# EAGLE board 4*Vibrationdriver_MSP430 (EAGLE 7.2.0)
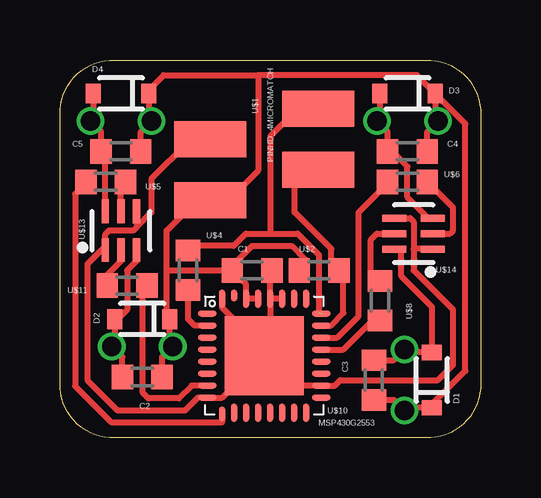
[diagram p0: board, top side]

Size 17.53 x 15.75 mm. Coordinates in mm from the lower left corner, seen from the top.
Outline: 17.53,13.46 17.53,2.29 arc-93 15.24,0 2.29,0 arc-93 0,2.29 0,13.46 arc-93 2.29,15.75 15.24,15.75 arc-93 17.53,13.46
Copper layers (1*16): Top 0.035mm / dielectric 1.5mm / Bottom 0.035mm
Design rules "we-dru": minimum track width 0.15mm, minimum drill 0.3mm, track to track 0.15mm, track to pad 0.15mm, pad to pad 0.15mm, via to via 0.15mm, smd to smd 0.1mm, copper to edge 0.5mm, drill to drill 0.2mm, minimum pad ring 0.18mm, minimum via ring 0.2mm, stop-mask expansion 0.1mm, vias tented up to drill 0.5mm, thermal gap 0.25mm

## Footprints (pad centres in the part's own frame; a part is rotated, then mirrored left to right if it is on the bottom)
603 = smd 0.889 x 1.016: 1 -0.826,0; 2 0.826,0
SOD-323 = smd 0.63 x 0.83: A 1.15,0; C -1.15,0
MICROMATCH4P0L = smd 1.5 x 3: P$1 -1.905,2.25; P$2 -0.635,-2.25; P$3 0.635,2.25; P$4 1.905,-2.25
PINHD2 = drill 0.8: P$1 -1.27,0; P$2 1.27,0
QFN32 = smd 0.762 x 0.254: 1 -2.375,1.75; 2 -2.375,1.25; 3 -2.375,0.75; 4 -2.375,0.25; 5 -2.375,-0.25; 6 -2.375,-0.75; 7 -2.375,-1.25; 8 -2.375,-1.75; 17 2.375,-1.75; 18 2.375,-1.25; 19 2.375,-0.75; 20 2.375,-0.25; 21 2.375,0.25; 22 2.375,0.75; 23 2.375,1.25; 24 2.375,1.75 | smd 0.254 x 0.635: 9 -1.75,-2.438 | smd 0.254 x 0.762: 10 -1.25,-2.375; 11 -0.75,-2.375; 12 -0.25,-2.375; 13 0.25,-2.375; 14 0.75,-2.375; 15 1.25,-2.375; 16 1.75,-2.375; 25 1.75,2.375; 26 1.25,2.375; 27 0.75,2.375; 28 0.25,2.375; 29 -0.25,2.375; 30 -0.75,2.375; 32 -1.75,2.375 | smd 0.254 x 0.508: 31 -1.25,2.5 | smd 3.302 x 3.302: TP 0,0
SOT363 = smd 0.3 x 0.99: 1 -0.65,-0.8; 2 0,-0.8; 3 0.65,-0.8; 4 0.65,0.81; 5 0,0.81; 6 -0.65,0.81

## Placement (x,y rotation side)
C1  10µ  [603]  8,6.99 0 top
C2  100n  [603]  3.43,2.54 180 top
C3  100n  [603]  13.08,2.41 90 top
C4  100n  [603]  14.48,11.94 180 top
C5  100n  [603]  2.54,11.94 180 top
D1  250mA/100V  [SOD-323]  15.49,2.41 90 top
D2  250mA/100V  [SOD-323]  3.43,4.95 180 top
D3  250mA/100V  [SOD-323]  14.48,14.35 180 top
D4  250mA/100V  [SOD-323]  2.54,14.35 180 top
U$1  PINHD_4MICROMATCH  [MICROMATCH4P0L]  8.51,11.81 270 top
U$1.6  PINHD_22.54MM  [PINHD2]  14.48,13.21 180 top
U$1.7  PINHD_22.54MM  [PINHD2]  14.35,2.41 90 top
U$2  10k  [603]  10.8,6.99 180 top
U$2.0  PINHD_22.54MM  [PINHD2]  3.43,3.81 180 top
U$3.0  PINHD_22.54MM  [PINHD2]  2.54,13.21 180 top
U$4  100  [603]  5.33,6.99 90 top
U$5  10k  [603]  1.91,10.67 180 top
U$6  10k  [603]  14.48,10.67 180 top
U$8  10k  [603]  13.34,5.71 270 top
U$10  MSP430G2553  [QFN32]  8.51,3.43 0 top
U$11  10k  [603]  2.79,6.35 0 top
U$13  MMDT3904  [SOT363]  2.54,8.64 0 top
U$14  MMDT3904  [SOT363]  14.73,8.51 90 top

## Library data of the parts
C1-C5 U$1 U$1.6 U$1.7 U$2 U$2.0 U$3.0 U$4-U$6 U$8 U$10 U$11 = thar
D1-D4 = SparkFun-DiscreteSemi; PROD_ID: DIO-09646
U$13 U$14 = SparkFun-DiscreteSemi; PROD_ID: TRANS-09373

## Nets
GND: C1.2 U$1.P$2 U$10.8 U$10.18 U$10.27 U$10.28 U$10.32 U$10.TP U$13.1 U$13.4 U$14.1 U$14.4
N$2: C2.2 D2.A U$2.0.P$2 U$13.3
N$3: U$6.1 U$14.2
N$4: C3.2 D1.A U$1.7.P$2 U$14.6
N$5: U$5.1 U$13.5
N$6: U$11.1 U$13.2
N$11: U$4.1 U$10.2
N$13: U$6.2 U$10.22
N$14: U$8.1 U$14.5
N$16: C4.2 D3.A U$1.6.P$2 U$14.3
N$18: U$8.2 U$10.21
N$19: U$5.2 U$10.9
N$20: C5.2 D4.A U$3.0.P$2 U$13.6
N$22: U$10.7 U$11.2
RST: U$1.P$3 U$2.1 U$10.23
TST: U$1.P$1 U$4.2 U$10.24
VCC: C1.1 C2.1 C3.1 C4.1 C5.1 D1.C D2.C D3.C D4.C U$1.6.P$1 U$1.7.P$1 U$1.P$4 U$2.0.P$1 U$2.2 U$3.0.P$1 U$10.29 U$10.30

## Tracks (layer width: path | path; a pad name or v marks a point on that pad's centre or on a via)
GND
  Top 0.254: U$10.27 U$10.28 | U$10.32 6.76,5.43 8.25,3.94 8.25,3.68 U$10.TP | U$10.28 8.76,3.68 U$10.TP | 7.87,2.79 6.76,1.68 U$10.8 5.74,1.68 5.21,1.14 2.41,1.14 1.14,2.41 1.14,7.24 1.89,7.99 | 7.87,2.79 U$10.TP | U$10.28 8.76,6.92 C1.2 | U$1.P$2 5.97,12.45 | 5.33,12.32 5.04,12.32 | 9.78,2.16 8.51,2.16 7.87,2.79 | 7.24,12.32 6.1,12.32 | 5.84,12.45 5.97,12.45 | 5.97,12.45 6.1,12.32 | U$10.TP 9.76,2.18 U$10.18 11.45,2.18 11.68,2.41 15.75,2.41 16.38,3.05 16.38,5.33 14.73,6.99 14.73,7.87 | U$14.4 14.59,9.16 14.73,9.02 14.73,7.87 | U$14.1 15.53,7.87 14.73,7.87 | 3.19,9.54 U$13.4 3.19,8.78 | 3.19,8.78 3.05,8.64 2.03,8.64 1.89,8.49 1.89,7.99 | U$13.1 1.89,7.99 | 6.1,12.32 5.33,12.32 | 5.33,12.32 3.81,10.8 3.81,9.4 3.19,8.78
N$2
  Top 0.254: C2.2 2.6,3.37 U$2.0.P$2 2.28,3.93 D2.A 2.41,4.95 2.79,5.33 2.79,6.99 3.19,7.38 U$13.3
N$3
  Top 0.254: U$14.2 16.26,8.51 16.38,8.64 16.38,9.59 U$6.1
N$4
  Top 0.254: C3.2 13.91,3.24 U$1.7.P$2 14.47,3.56 D1.A 15.49,5.46 14.22,6.73 14.22,7.86 U$14.6
N$5
  Top 0.254: U$13.5 2.54,10.48 U$5.1
N$6
  Top 0.254: 2.03,6.41 U$11.1 1.97,6.8 2.54,7.37 U$13.2
N$11
  Top 0.254: 5.33,6.22 5.4,6.16 U$4.1 5.33,4.95 5.61,4.68 U$10.2
N$13
  Top 0.254: U$10.22 11.55,4.18 12.45,5.08 12.45,9.4 13.72,10.67 | 13.72,10.67 13.84,10.8 | U$6.2 13.72,10.67
N$14
  Top 0.254: U$14.5 13.21,8.51 12.95,8.25 12.95,6.92 U$8.1
N$16
  Top 0.254: D3.A 13.33,13.33 U$1.6.P$2 13.65,12.76 C4.2 13.84,11.94 14.48,11.3 14.48,10.03 15.35,9.16 U$14.3
N$18
  Top 0.254: U$10.21 11.81,3.68 13.02,4.89 U$8.2
N$19
  Top 0.254: U$10.9 6.76,0.66 6.73,0.64 2.16,0.64 0.63,2.16 0.63,10.16 0.76,10.29 0.76,10.54 0.89,10.67 U$5.2
N$20
  Top 0.254: D4.A 1.39,13.33 U$3.0.P$2 1.71,12.76 C5.2 1.52,11.94 1.89,11.57 U$13.6
N$22
  Top 0.254: U$10.7 5.48,2.18 4.95,1.65 3.68,1.65 3.43,1.91 3.43,5.97 3.62,6.16 U$11.2
RST
  Top 0.254: U$10.23 11.28,4.68 11.81,5.21 11.81,6.8 U$2.1 | U$2.1 11.81,6.99 | 11.56,11.05 11.3,11.3 10.89,11.3 U$1.P$3 10.63,11.05 9.78,11.05 9.78,9.4 11.3,7.87 11.3,7.24 11.56,6.99 U$2.1
TST  (1 unrouted)
  Top 0.254: U$10.24 11.02,5.18 | 10.8,5.21 10.8,7.62 9.91,8.51 8.76,8.51 | 10.16,13.72 U$1.P$1 10.63,13.59 9.78,13.59 8.76,12.57 8.76,8.51 | 8.76,8.51 7.75,8.51 7.24,8 5.52,8 U$4.2
VCC
  Top 0.254: U$10.29 U$10.30 7.76,6.4 C1.1 | 6.79,9.97 6.73,10.03 | 6.73,10.03 7.15,10.03 8.25,11.14 8.25,15.11 | C1.1 7.18,7.18 8,8 9.65,8 10.22,7.43 10.22,7.24 U$2.2 9.97,7.05 | 5.46,10.29 5.88,10.29 U$1.P$4 6.39,10.03 | 6.39,10.03 5.84,10.03 4.45,8.64 4.45,6.99 | 4.45,6.99 C1.1 | 6.73,10.03 6.39,10.03 | C2.1 4.25,3.37 U$2.0.P$1 4.58,3.93 D2.C 4.46,5.07 4.45,5.07 4.45,6.99 | C5.1 3.37,12.76 U$3.0.P$1 3.69,13.33 D4.C 3.69,14.48 4.32,15.11 8.25,15.11 | 8.25,15.11 14.87,15.11 D3.C | C4.1 15.3,12.76 U$1.6.P$1 15.63,13.33 D3.C | D3.C 16.89,13.09 16.89,2.79 15.49,1.4 D1.C 14.47,1.26 U$1.7.P$1 13.91,1.59 C3.1